# Altium PCB Motor_Controller_Interface_Board.PcbDoc
Units mm, origin at the board's own origin, x right, y up, seen from the top; angles counter-clockwise.
Board outline 50 x 50 mm, 2 copper layers (Top Layer, Bottom Layer); 35 components, 45 nets, 173 pads, 37 vias.
Unrouted connection lines stored in the file: 12.
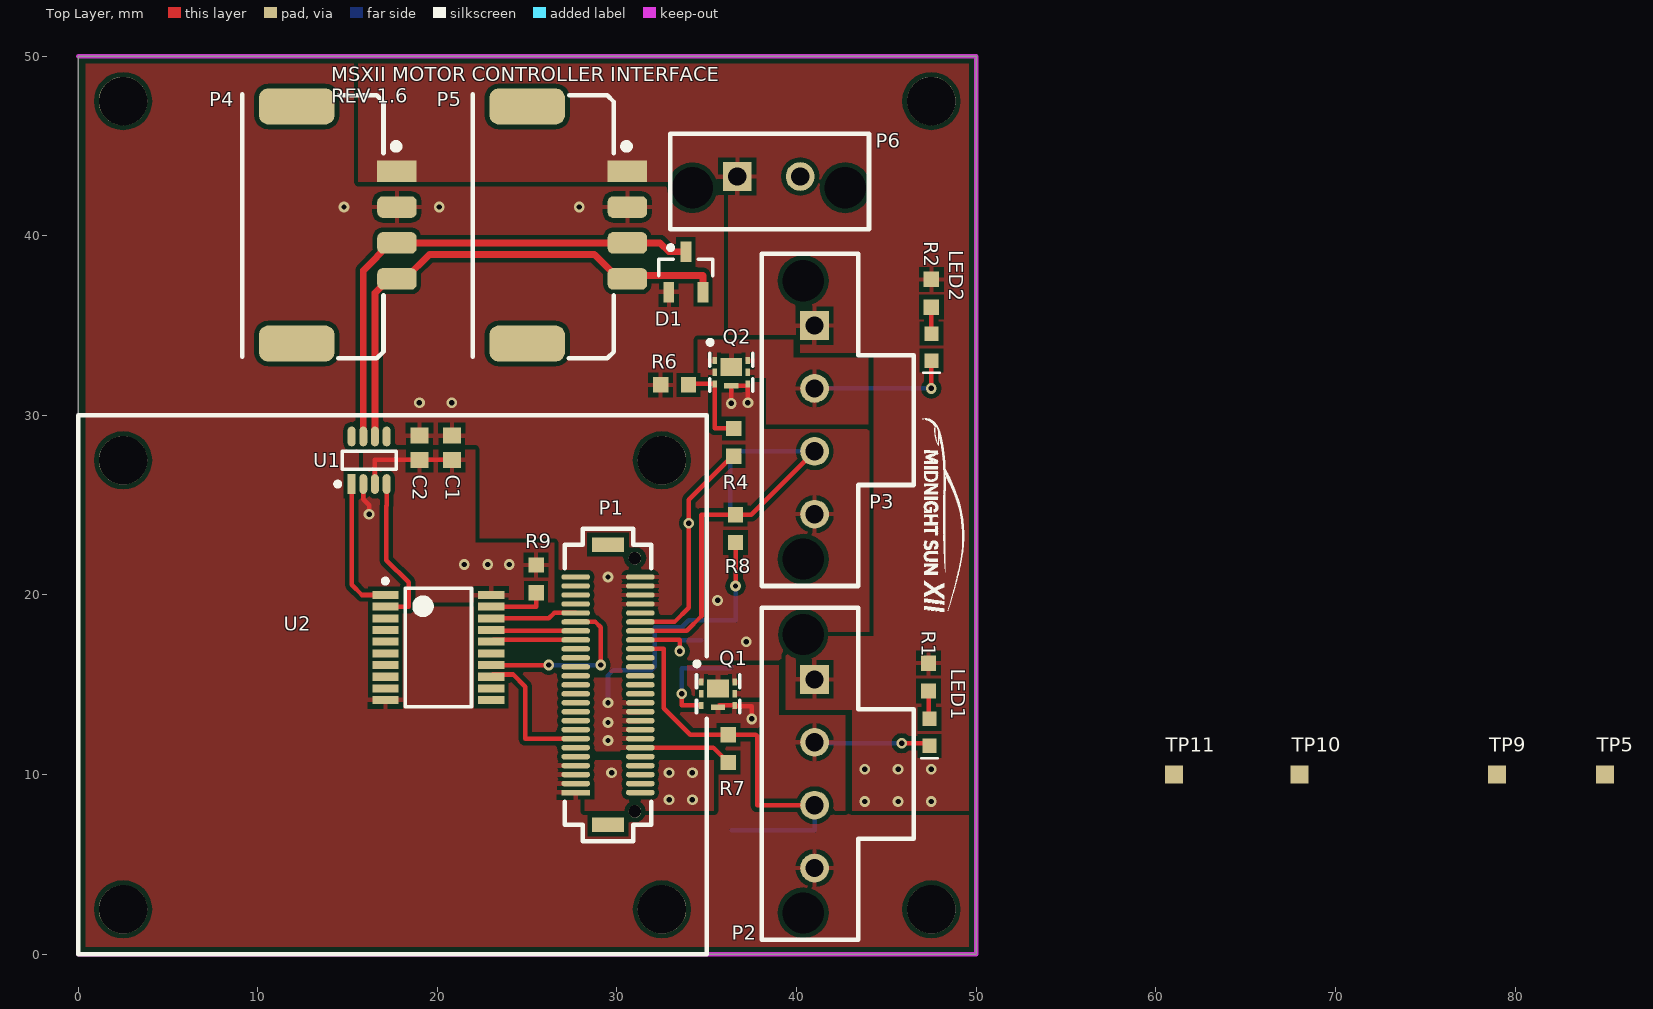
[diagram p0: Top Layer view]
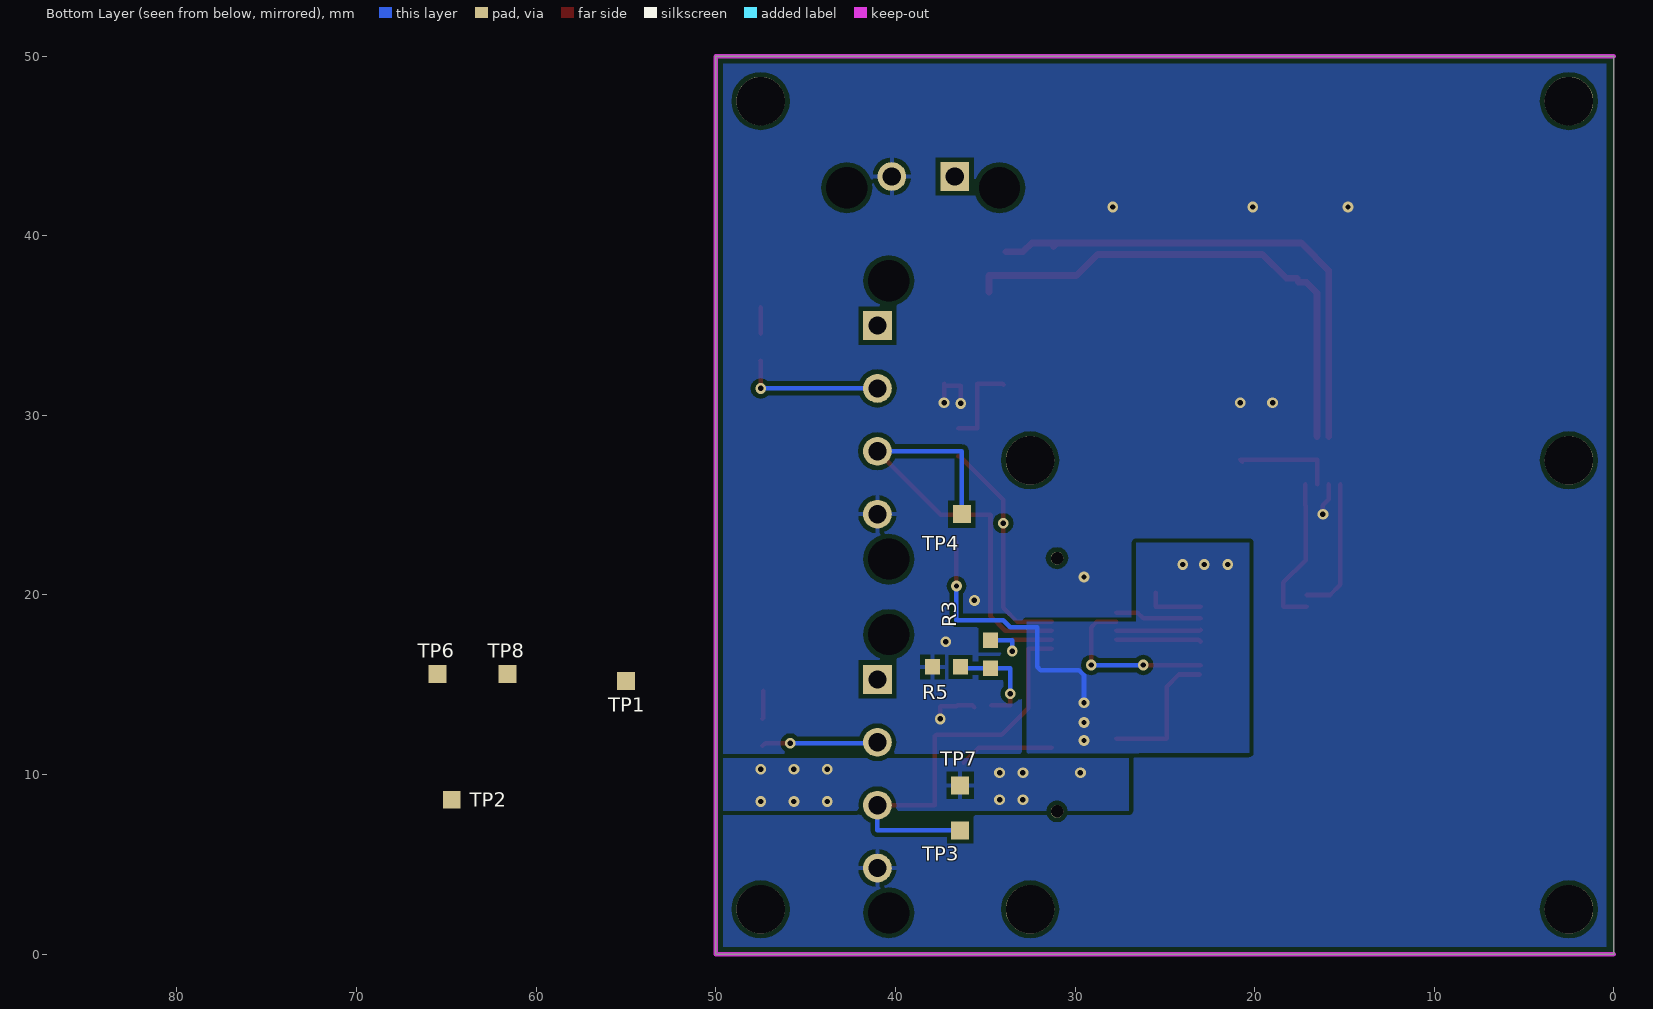
[diagram p1: Bottom Layer view, seen from below]

## Layer stack, top to bottom
Top Solder: solder mask 0.0102, Solder Resist, Dk 3.5
Top Layer: signal copper 0.0356
Dielectric 1: dielectric 0.32, FR-4, Dk 4.8
Bottom Layer: signal copper 0.0356
Bottom Solder: solder mask 0.0102, Solder Resist, Dk 3.5

## Board outline
0,0 0,50 50,50 50,0

## Design rules (kind name [scope] priority, off if disabled: settings)
BoardOutlineClearance [All] p1: gap=0.406 ignorepadtopadclearanceinfootprint=FALSE
Clearance [All] p1: gap=0.254 ignorepadtopadclearanceinfootprint=TRUE except(0: Arc-Hole Track-Hole SMDPad-Hole THPad-Hole Via-Hole Fill-Hole Poly-Hole Region-Hole Text-Hole; 0.152: Arc-Arc Arc-Track Arc-SMDPad Track-Track Track-SMDPad SMDPad-SMDPad)
ComponentClearance ComponentClearance_ControllerBoard [InComponent('P1') vs Identifier = 'Controller_Board'] p1: gap=0 collisioncheckmode=3 verticalgap=0 showdistances=FALSE
ComponentClearance ComponentClearance_Standoffs [Identifier = 'Standoff' vs Identifier = 'Controller_Board'] p2: gap=0 collisioncheckmode=3 verticalgap=0 showdistances=FALSE
ComponentClearance [All] p3: gap=0.254 collisioncheckmode=3 verticalgap=0.254 showdistances=FALSE
DiffPairsRouting [All] p1: maxlimit=0.254 minlimit=0.254 mostfreqgap=0.254 toplayer_minwidth=0.381 toplayer_maxwidth=0.381 toplayer_prefwidth=0.381 bottomlayer_minwidth=0.381 bottomlayer_maxwidth=0.381 bottomlayer_prefwidth=0.381 maxuncoupledlength=12.7
HoleSize [All] p1: absolutevalues=TRUE maxlimit=6.3 minlimit=0.3 maxpercent=80.000 minpercent=20.000
MinimumAnnularRing [All] p1: minimumring=0.15
MinimumSolderMaskSliver [All] p1: minsoldermaskwidth=0.3
PolygonConnect PolygonConnect_Via [IsVia] p1: connectstyle=Direct reliefconductorwidth=0.254 reliefentries=4 polygonreliefangle="90 Angle" airgapwidth=0.254
PolygonConnect PolygonConnect_Direct [InComponent('P5') OR InComponent('P4') vs InNet('12V')] p2: connectstyle=Direct reliefconductorwidth=0.254 reliefentries=4 polygonreliefangle="90 Angle" airgapwidth=0.254
PolygonConnect [All] p3: connectstyle=Relief reliefconductorwidth=0.254 reliefentries=4 polygonreliefangle="90 Angle" airgapwidth=0.254
PolygonConnect PolygonConnect_NoThermal [Not(IsPad)] p4: connectstyle=Direct reliefconductorwidth=0.254 reliefentries=4 polygonreliefangle="90 Angle" airgapwidth=0.254
RoutingVias [All] p1: holewidth=0.3 width=0.6 viastyle="Through Hole" minholewidth=0.3 minwidth=0.6 maxholewidth=0.711 maxwidth=1.27
SilkToSilkClearance SilkToSilkClearance_Top [OnLayer('Top Overlay') vs OnLayer('Top Overlay')] p1: silktosilkclearance=0.254
SilkToSilkClearance SilkToSilkClearance_Bottom [OnLayer('Bottom Overlay') vs OnLayer('Bottom Overlay')] p2: silktosilkclearance=0.254
SilkToSolderMaskClearance [IsPad] p1: minsilkscreentomaskgap=0.178 clearancetoexposedcopper=TRUE
SolderMaskExpansion [All] p1: expansion=0.102
Width Width_12V [InNet('12V')] p1: maxlimit=0.381 minlimit=0.381 preferedwidth=0.381
Width [All] p2: maxlimit=2.54 minlimit=0.152 preferedwidth=0.254
24 further rules are at their usual default settings.

## Classes and differential pairs
component class Pre_Charge_Interface: LED1 LED2 P2 P3 Q1 Q2 R1 R2 R3 R4 R5 R6 R7 R8 TP1 TP2 TP3 TP4
component class Slave_Controller: C1 C2 D1 P4 P5 P6 R9 TP5 TP6 TP7 TP8 TP9 TP10 TP11 U1 U2
component class Controller_Board_Interface: P1
differential pair CAN: +MOTOR_CONTROLLER_CAN_P -MOTOR_CONTROLLER_CAN_N

## Components (designator, comment, footprint, x,y, rotation, side; value= is the part's Value field where it differs from the comment)
C1 "CAP CER 4.7UF 25V 10% X5R 0603" "CAP, 0603" 20.809,28.2 r270 top
C2 "CAP CER 0.1UF 50V 10% X7R 0603" "CAP, 0603" 19.004,28.2 r270 top
D1 "DIODE TVS 24VWM 70VC SOT23" SOT23 33.836,37.989 r90 top
LED1 "LED GREEN CLEAR 2V 0603" LED_0603 47.39,13.05 r270 top
LED2 "LED GREEN CLEAR 2V 0603" LED_0603 47.5,34.5 r270 top
P1 "CONN 50POS Bergstak Plug 0.02\"" "CONN, BERGSTAK 50 POS PLUG" 29.5,15 r180 top locked
P2 "CONN 4POS ULTRA-FIT 0.138\"" "CONN, 4POS ULTRA-FIT" 41,15.3 r270 top
P3 "CONN 4POS ULTRA-FIT 0.138\"" "CONN, 4POS ULTRA-FIT" 41,35 r270 top
P4 "Dura-Clik" "CONN, 4POS DURA-CLIK VERT" 17.75,43.6 r270 top
P5 "Dura-Clik" "CONN, 4POS DURA-CLIK VERT" 30.58,43.6 r270 top
P6 "CONN 2POS ULTRA-FIT 0.138\"" "CONN, 2POS ULTRA-FIT" 36.7,43.3 r0 top
Q1 "MOSFET N-CH 30V 8.7A 2.1W 6-PQFN (2x2)" "MOSFET N-CH 30V 12A 2mmx2mm PQFN" 34.7,15.15 r270 top
Q2 "MOSFET N-CH 30V 8.7A 2.1W 6-PQFN (2x2)" "MOSFET N-CH 30V 12A 2mmx2mm PQFN" 35.439,33.05 r270 top
R1 "RES 4.7K OHM 1% 1/10W 0603" "RES, 0603" 47.349,15.431 r270 top
R2 "RES 4.7K OHM 1% 1/10W 0603" "RES, 0603" 47.5,36.8 r270 top
R3 "RES 22.1 OHM 1% 1/10W 0603" "RES, 0603" 34.7,16.7 r90 bottom
R4 "RES 22.1 OHM 1% 1/10W 0603" "RES, 0603" 36.5,28.5 r90 top
R5 "RES 10K OHM 1% 1/10W 0603" "RES, 0603" 37.154,16 r0 bottom
R6 "RES 10K OHM 1% 1/10W 0603" "RES, 0603" 33.205,31.7 r180 top
R7 "RES 10K OHM 1% 1/10W 0603" "RES, 0603" 36.2,11.446 r90 top
R8 "RES 10K OHM 1% 1/10W 0603" "RES, 0603" 36.6,23.7 r90 top
R9 "RES 10K OHM 1% 1/10W 0603" "RES, 0603" 25.5,20.9 r270 top
TP1 "Test Point" "Test Point" 55,15.2 r0 bottom
TP2 "Test Point" "Test Point" 64.7,8.6 r90 bottom
TP3 "Test Point" "Test Point" 36.4,6.9 r90 bottom
TP4 "Test Point" "Test Point" 36.3,24.5 r90 bottom
TP5 "CAN_TX" "Test Point" 85,10 r90 top
TP6 "Test Point" "Test Point" 65.5,15.6 r90 bottom
TP7 "Test Point" "Test Point" 36.4,9.4 r90 bottom
TP8 "Test Point" "Test Point" 61.6,15.6 r90 bottom
TP9 "CAN_RX" "Test Point" 79,10 r90 top
TP10 "CAN_CLOCK" "Test Point" 68,10 r90 top
TP11 "CAN_INT_n" "Test Point" 61,10 r90 top
U1 "IC CAN Tranceiver TCAN332DR" TSOP65P280X145-8N 16.2,27.5 r90 top
U2 "MCP2515" TSSOP65P640X120-20N 20.05,17.075 r0 top

## Footprints (in the part's own frame and the unit in brackets; to place one, negate y for a bottom-side part, rotate by r counter-clockwise, add the part's x,y. Pads: shape width x height; smd on the part's side, far side on the other; paste and mask are expansions set on the pad)
"CAP, 0603" [mm] "Chip Capacitor, 2-Leads, Body 1.60x0.81mm, IPC Medium Density"
  rect 0.9x1 smd mask+0.076: 1(-0.675,0) 2(0.675,0)
  body extent -0.87,-0.48 0.87,0.48, height 0.9
"CONN, 2POS ULTRA-FIT" [mm] "2 Positions Header, Shrouded Connector 0.138\" (3.50mm) Through Hole Gold"
  rect 1.6x1.6 hole 1.02: 1(0,0)
  round 1.6 hole 1.02: 2(3.5,0)
  round 1.6 hole 2.3: ""(-2.5,-0.63) ""(6,-0.63)
  silkscreen extent -3.74,-2.93 7.33,2.37, body extent -3.48,-2.87 7.12,5.79, height 13.85
"CONN, 4POS DURA-CLIK VERT" [mm]
  rect 1.2x2.2 smd: 1(0,0)
  rrect50% 1.2x2.2 smd: 2(2,0) 3(4,0) 4(6,0)
  rrect50% 2x4.2 smd: 7(-3.6,-5.58) 7(9.6,-5.58)
  silkscreen extent -4.28,-8.61 10.42,0.05, body extent -4.28,-8.61 10.32,0.54, height 8
"CONN, 4POS ULTRA-FIT" [mm]
  rect 1.6x1.6 hole 1.02: 1(0,0)
  round 1.6 hole 1.02: 2(3.5,0) 3(7,0) 4(10.5,0)
  round 0 hole 2.3: ""(-2.5,-0.63) ""(13,-0.63)
  silkscreen extent -4,-2.93 14.5,5.53, body extent -3.54,-2.78 14.06,5.88, height 13.85
"CONN, BERGSTAK 50 POS PLUG" [mm] "Bergstak 50 Position Plug"
  rect 1.6x0.3 smd: 1(1.8,6)
  oval 1.6x0.3 smd: 2(1.8,5.5) 3(1.8,5) 4(1.8,4.5) 5(1.8,4) 6(1.8,3.5) 7(1.8,3) 8(1.8,2.5) 9(1.8,2) 10(1.8,1.5) 11(1.8,1) 12(1.8,0.5) 13(1.8,0) 14(1.8,-0.5) 15(1.8,-1) 16(1.8,-1.5) 17(1.8,-2) 18(1.8,-2.5) 19(1.8,-3) 20(1.8,-3.5) 21(1.8,-4) 22(1.8,-4.5) 23(1.8,-5) 24(1.8,-5.5) 25(1.8,-6) 26(-1.8,-6) 27(-1.8,-5.5) 28(-1.8,-5) 29(-1.8,-4.5) 30(-1.8,-4) 31(-1.8,-3.5) 32(-1.8,-3) 33(-1.8,-2.5) 34(-1.8,-2) 35(-1.8,-1.5) 36(-1.8,-1) 37(-1.8,-0.5) 38(-1.8,0) 39(-1.8,0.5) 40(-1.8,1) 41(-1.8,1.5) 42(-1.8,2) 43(-1.8,2.5) 44(-1.8,3) 45(-1.8,3.5) 46(-1.8,4) 47(-1.8,4.5) 48(-1.8,5) 49(-1.8,5.5) 50(-1.8,6)
  round 0.7 hole 0.7: ""(-1.5,7.05) ""(-1.5,-7.05)
  rect 1.8x0.8 smd: ""(0,7.8) ""(0,-7.8)
  silkscreen extent -2.4,-8.7 2.4,8.7, body extent -2.3,-7.75 2.3,7.75, height 4.2
LED_0603 [mm]
  rect 0.8x0.8 smd: 1(-0.05,0.01) 2(1.45,0.01)
  silkscreen extent 2.13,-0.46 2.13,0.45, body extent -0.09,-0.39 1.51,0.41, height 0.8
"MOSFET N-CH 30V 12A 2mmx2mm PQFN" [mm] "PQFN, 6-Leads, Body 2.00x2.00mm, Pitch 0.65mm/0.50mm, Thermal Pad 1.00x1.20mm, IPC Medium Density"
  rect 0.4x0.25 smd: 1(0,0) 2(0.65,0) 3(1.3,0) 4(1.3,1.85) 5(0.65,1.85) 6(0,1.85)
  rect 1x1.2 smd: 7(0.35,0.925)
  rect 0.3x0.79 smd: 8(1.39,0.925)
  silkscreen extent -1.14,-0.38 1.7,2.12, body extent -0.4,-0.13 1.7,1.97, height 1
"RES, 0603" [mm] "Chip Resistor, 2-Leads, Body 1.60x0.80mm, IPC Medium Density"
  rect 0.85x0.85 smd: 1(-0.775,0) 2(0.775,0)
  body extent -0.8,-0.4 0.8,0.4, height 0.55
SOT23 [mm] "SOT23, 3-Leads, Body 2.9x1.3mm, Pitch 0.95mm, Lead Span 2.3mm - Reverse Pinning, IPC Medium Density"
  rect 1.15x0.6 smd: 1(1.125,0) 2(-1.125,-0.95) 3(-1.125,0.95)
  silkscreen extent -0.2,-1.5 1.47,1.5, body extent -0.7,-1.5 0.7,1.5, height 1.1
"Test Point" [mm]
  rect 1x1 smd paste-2: TP(0,0)
TSOP65P280X145-8N [mm] "TSOP, 8-Leads, Body 2.90x1.60mm, Pitch 0.65mm, IPC Medium Density"
  rect 1.1x0.45 smd: 1(-1.325,0.975)
  oval 1.1x0.45 smd: 2(-1.325,0.325) 3(-1.325,-0.325) 4(-1.325,-0.975) 5(1.325,-0.975) 6(1.325,-0.325) 7(1.325,0.325) 8(1.325,0.975)
  silkscreen extent -1.45,-1.5 0.5,1.87, body extent -1.39,-1.5 1.39,1.5, height 1.45
TSSOP65P640X120-20N [mm] "TSSOP, 20-Leads, Body 6.50x4.40mm, Pitch 0.65mm, IPC Medium Density"
  rect 1.45x0.45 smd: 1(-2.95,2.925) 2(-2.95,2.275) 3(-2.95,1.625) 4(-2.95,0.975) 5(-2.95,0.325) 6(-2.95,-0.325) 7(-2.95,-0.975) 8(-2.95,-1.625) 9(-2.95,-2.275) 10(-2.95,-2.925) 11(2.95,-2.925) 12(2.95,-2.275) 13(2.95,-1.625) 14(2.95,-0.975) 15(2.95,-0.325) 16(2.95,0.325) 17(2.95,0.975) 18(2.95,1.625) 19(2.95,2.275) 20(2.95,2.925)
  silkscreen extent -3.07,-3.3 1.85,3.82, body extent -2.25,-3.3 2.25,3.3, height 1.2

## Part data
C1: "4.7µF ±10% 25V Ceramic Capacitor X5R 0603 (1608 Metric)", Capacitance=4.7µF, Manufacturer 1="Murata Electronics North America", Manufacturer Part Number 1=GRM188R61E475KE11D, Operating Temperature="-55°C ~ 85°C", Package / Case="0603 (1608 Metric)", Ratings=-, Supplier Part Number 1=490-7203-1-ND, Temperature Coefficient=X5R, Tolerance=±10%, Voltage=25V, ComponentLink1Description=http://www.murata.com/~/media/webrenewal/support/library/catalog/products/capacitor/mlcc/c02e.ashx, ComponentLink1URL=http://www.murata.com/~/media/webrenewal/support/library/catalog/products/capacitor/mlcc/c02e.ashx, Height - Seated (Max)=-, Lead Spacing=-, Lead Style=-, Mounting Type="Surface Mount, MLCC", Packaging="Cut Tape (CT)", Part Status=Active, Size / Dimension="0.063\" L x 0.031\" W (1.60mm x 0.80mm)", Supplier 1=Digi-Key, Thickness (Max)="0.031\" (0.80mm)"
C2: "0.10µF ±10% 50V Ceramic Capacitor X7R 0603 (1608 Metric)", Capacitance=0.1µF, Manufacturer 1="AVX Corporation", Manufacturer Part Number 1=06035C104KAT2A, Operating Temperature="-55°C ~ 125°C", Package / Case="0603 (1608 Metric)", Ratings=-, Supplier Part Number 1=478-5052-1-ND, Temperature Coefficient=X7R, Tolerance=±10%, Voltage=50V, ComponentLink1Description=http://datasheets.avx.com/X7RDielectric.pdf, ComponentLink1URL=http://datasheets.avx.com/X7RDielectric.pdf, Height - Seated (Max)=-, Lead Spacing=-, Lead Style=-, Mounting Type="Surface Mount, MLCC", Packaging="Cut Tape (CT)", Part Status=Active, Size / Dimension="0.063\" L x 0.032\" W (1.60mm x 0.81mm)", Supplier 1=Digi-Key, Thickness (Max)="0.035\" (0.90mm)"
D1: "TVS DIODE 24VWM 70VC SOT23", Capacitance @ Frequency="11pF @ 1MHz", Current - Peak Pulse (10/1000µs)="3A (8/20µs)", Manufacturer 1="Nexperia USA Inc.", Manufacturer Part Number 1=PESD1CAN,215, Operating Temperature="-65°C ~ 150°C (TA)", Package / Case="TO-236-3, SC-59, SOT-23-3", Power - Peak Pulse=200W, Power Line Protection=No, Supplier Device Package="SOT-23 (TO-236AB)", Supplier Part Number 1=1727-3817-1-ND, Voltage - Breakdown (Min)=25.4V, Voltage - Clamping (Max) @ Ipp=70V, ComponentLink1Description=http://assets.nexperia.com/documents/data-sheet/PESD1CAN.pdf, ComponentLink1URL=http://assets.nexperia.com/documents/data-sheet/PESD1CAN.pdf, Mounting Type="Surface Mount", Packaging="Cut Tape (CT)", Part Status=Active, Supplier 1=Digi-Key, Type=Zener
LED1 LED2: "Green 572nm LED Indication - Discrete 2V 0603 (1608 Metric)", Color=Green, Current - Test=20mA, Lens Color=Colorless, Manufacturer="Wurth Electronics Inc.", Manufacturer Part Number=150060VS75000, Millicandela Rating=40mcd, Package / Case="0603 (1608 Metric)", Supplier Device Package=0603, Supplier Part Number 1=732-4980-1-ND, Voltage - Forward (Vf) (Typ)=2V, Category=Optoelectronics, ComponentLink1Description=http://katalog.we-online.de/led/datasheet/150060VS75000.pdf, ComponentLink1URL=http://katalog.we-online.de/led/datasheet/150060VS75000.pdf, Features=-, Height (Max)=0.80mm, Lens Style/Size="Rectangle with Flat Top, 1.10mm x 0.70mm", Lens Transparency=Clear, Mounting Type="Surface Mount", Packaging="Cut Tape (CT)", Part Status=Active, Pricing 1="1=0.21, 100=0.1617, 500=0.13964 (CAD)", RoHS="RoHS Compliant", Size / Dimension="1.60mm L x 0.80mm W", Stock 1=9408, Supplier 1=Digi-Key, Viewing Angle=140°, Wavelength - Dominant=570nm, Wavelength - Peak=572nm
P1: "50 Position Connector Plug, Outer Shroud Contacts Surface Mount Gold", Manufacturer 1="Amphenol FCI", Manufacturer Part Number 1=10132797-055100LF, Supplier Part Number 1=609-5226-1-ND, ComponentLink1Description=http://portal.fciconnect.com/Comergent//fci/drawing/10132797.pdf, ComponentLink1URL=http://portal.fciconnect.com/Comergent//fci/drawing/10132797.pdf, Connector Type="Plug, Outer Shroud Contacts", Contact Finish=Gold, Contact Finish Thickness="1µin (0.025µm)", Height Above Board="0.169\" (4.30mm)", Mated Stacking Heights=5mm, Mounting Type="Surface Mount", Number of Positions=50, Number of Rows=2, Packaging="Cut Tape (CT)", Part Status=Active, Pitch="0.020\" (0.50mm)", Series="BergStak Plug", Supplier 1=Digi-Key
P2 P3: "4 Positions Header Connector 0.138\" (3.50mm) Through Hole Tin", Current Rating=-, Insulation Color=Black, Manufacturer 1="Molex, LLC", Manufacturer Part Number 1=1722871104, Material Flammability Rating="UL94 V-0", Operating Temperature="-40°C ~ 105°C", Supplier Part Number 1=WM11703-ND, Voltage=400V, ComponentLink1Description=http://www.molex.com/pdm_docs/sd/1722871104_sd.pdf, ComponentLink1URL=http://www.molex.com/pdm_docs/sd/1722871104_sd.pdf, Connector Type=Header, Contact Finish - Mating=Tin, Contact Finish - Post=Tin, Contact Finish Thickness - Mating="60µin (1.52µm)", Contact Finish Thickness - Post="60µin (1.52µm)", Contact Length - Mating=-, Contact Length - Post="0.126\" (3.20mm)", Contact Material="Copper Alloy", Contact Shape=Square, Contact Type="Male Pin", Fastening Type="Latch Holder", Ingress Protection=-, Insulation Height="0.465\" (11.80mm)", Insulation Material="Liquid Crystal Polymer (LCP)", Mated Stacking Heights=26.99mm, Mounting Type="Through Hole", Number of Positions=4, Number of Positions Loaded=All, Number of Rows=1, Overall Contact Length=-, Packaging=Tray, Part Status=Active, Pitch - Mating="0.138\" (3.50mm)", Row Spacing - Mating=-, Series=UltraFit, Shrouding="Shrouded - 4 Wall", Style="Board to Cable/Wire", Supplier 1=Digi-Key, Termination=Solder
P4 P5: library part "CONN 4POS DURA-CLIK 0.079\"", "4 Positions Header Connector 0.079\" (2.00mm) Surface Mount Tin", Current Rating=-, Insulation Color=Natural, Manufacturer="Molex, LLC", Manufacturer Part Number=5600200420, Supplier Part Number 1=WM10864CT-ND, Applications="Automotive, Industrial", Category="Connectors, Interconnects", ComponentLink1Description=http://www.molex.com/pdm_docs/sd/5600200420_sd.pdf, ComponentLink1URL=http://www.molex.com/pdm_docs/sd/5600200420_sd.pdf, Connector Type=Header, Contact Finish - Mating=Tin, Contact Finish - Post=Tin, Contact Finish Thickness - Mating=-, Contact Finish Thickness - Post=-, Contact Length - Mating=-, Contact Length - Post=-, Contact Material="Copper Alloy", Contact Shape=Square, Contact Type="Male Pin", Fastening Type="Latch Lock", Features="Solder Retention", Ingress Protection=-, Insulation Height="0.315\" (8.00mm)", Insulation Material="Polyamide (PA), Nylon", Mated Stacking Heights=9.3mm, Material Flammability Rating=-, Mounting Type="Surface Mount", Number of Positions=4, Number of Positions Loaded=All, Number of Rows=1, Operating Temperature=-, Overall Contact Length=-, Packaging="Cut Tape (CT)", Part Status=Active, Pitch - Mating="0.079\" (2.00mm)", Pricing 1="1=2.23, 10=2.022, 25=1.898, 50=1.8156, 100=1.733 (CAD)", RoHS="RoHS Compliant", Row Spacing - Mating=-, Shrouding="Shrouded - 4 Wall", Stock 1=9367, Style="Board to Cable/Wire", Supplier 1=Digi-Key, Termination=Solder, Voltage Rating=-
P6: "2 Positions Header, Shrouded Connector 0.138\" (3.50mm) Through Hole Gold", Current Rating=-, Insulation Color=Black, Manufacturer 1="Molex, LLC", Manufacturer Part Number 1=1722861302, Material Flammability Rating="UL94 V-0", Operating Temperature="-40°C ~ 120°C", Supplier Part Number 1=WM11673-ND, Voltage=400V, ComponentLink1Description=http://www.molex.com/pdm_docs/sd/1722861302_sd.pdf, ComponentLink1URL=http://www.molex.com/pdm_docs/sd/1722861302_sd.pdf, Connector Type=Header, Contact Finish - Mating=Gold, Contact Finish - Post=Tin, Contact Finish Thickness - Mating="30µin (0.76µm)", Contact Finish Thickness - Post="60µin (1.52µm)", Contact Length - Mating=-, Contact Length - Post="0.126\" (3.20mm)", Contact Material="Copper Alloy", Contact Shape=Square, Contact Type="Male Pin", Fastening Type="Latch Holder", Ingress Protection=-, Insulation Height="0.465\" (11.80mm)", Insulation Material="Liquid Crystal Polymer (LCP)", Mated Stacking Heights=26.99mm, Mounting Type="Through Hole", Number of Positions=2, Number of Positions Loaded=All, Number of Rows=1, Overall Contact Length=-, Packaging=Tray, Part Status=Active, Pitch - Mating="0.138\" (3.50mm)", Row Spacing - Mating=-, Series=UltraFit, Shrouding="Shrouded - 4 Wall", Style="Board to Board or Cable", Supplier 1=Digi-Key, Termination="Kinked Pin, Solder"
Q1 Q2: Current - Continuous Drain (Id) @ 25°C=8.7A, Drain to Source Voltage (Vdss)=30V, Drive Voltage (Max Rds On,  Min Rds On)="2.5V, 4.5V", Input Capacitance (Ciss) (Max) @ Vds="1019pF @ 25V", Manufacturer 1="Infineon Technologies", Manufacturer Part Number 1=IRLHS6342TRPBF, Operating Temperature="-55°C ~ 150°C (TJ)", Package / Case=6-PowerVDFN, Power Dissipation (Max)=2.1W, Supplier Device Package="6-PQFN (2x2)", Supplier Part Number 1=IRLHS6342TRPBFCT-ND, Category="Discrete Semiconductor Products", ComponentLink1Description=http://www.infineon.com/dgdl/irlhs6342pbf.pdf?fileId=5546d462533600a401535663b52625ad, ComponentLink1URL=http://www.infineon.com/dgdl/irlhs6342pbf.pdf?fileId=5546d462533600a401535663b52625ad, Description 1="MOSFET N-CH 30V 8.7A 2X2 PQFN", FET Feature=-, FET Type=N-Channel, Gate Charge (Qg) (Max) @ Vgs="11nC @ 4.5V", Mounting Type="Surface Mount", Packaging="Cut Tape (CT)", Part Status=Active, Pricing 1="1=0.79, 10=0.685, 100=0.5118, 500=0.4022, 1000=0.31079 (CAD)", Rds On (Max) @ Id, Vgs="15.5 mOhm @ 8.5A, 4.5V", RoHS="RoHS Compliant", Stock 1=9984, Supplier 1=Digi-Key, Technology="MOSFET (Metal Oxide)", Vgs (Max)=±12V, Vgs(th) (Max) @ Id="1.1V @ 10µA"
R1 R2: "4.7k Ohm ±1% 0.1W, 1/10W Chip Resistor 0603 (1608 Metric) Moisture Resistant Thick Film", Manufacturer 1=Yageo, Manufacturer Part Number 1=RC0603FR-074K7L, Operating Temperature="-55°C ~ 155°C", Package / Case="0603 (1608 Metric)", Power (Watts)=1/10W, Resistance (Ohms)=4.7k, Supplier Device Package=0603, Supplier Part Number 1=311-4.70KHRCT-ND, Temperature Coefficient=±100ppm/°C, Tolerance=±1%, Category=Resistors, ComponentLink1Description=http://www.yageo.com/documents/recent/PYu-RC_Group_51_RoHS_L_7.pdf, ComponentLink1URL=http://www.yageo.com/documents/recent/PYu-RC_Group_51_RoHS_L_7.pdf, Composition="Thick Film", Description 1="RES SMD 4.7K OHM 1% 1/10W 0603", Failure Rate=-, Features="Moisture Resistant", Height - Seated (Max)="0.022\" (0.55mm)", Packaging="Cut Tape (CT)", Part Status=Active, Pricing 1="1=0.16, 10=0.022, 100=0.0089, 1000=0.00402, 2500=0.00349 (CAD)", RoHS="RoHS Compliant", Size / Dimension="0.063\" L x 0.031\" W (1.60mm x 0.80mm)", Stock 1=3487566, Supplier 1=Digi-Key
R3 R4: "22.1 Ohm ±1% 0.1W, 1/10W Chip Resistor 0603 (1608 Metric) Moisture Resistant Thick Film", Manufacturer 1=Yageo, Manufacturer Part Number 1=RC0603FR-0722R1L, Operating Temperature="-55°C ~ 155°C", Package / Case="0603 (1608 Metric)", Power=1/10W, Resistance=22.1, Supplier Device Package=0603, Supplier Part Number 1=311-22.1HRCT-ND, Temperature Coefficient=±100ppm/°C, Tolerance=±1%, ComponentLink1Description=http://www.yageo.com/documents/recent/PYu-RC_Group_51_RoHS_L_7.pdf, ComponentLink1URL=http://www.yageo.com/documents/recent/PYu-RC_Group_51_RoHS_L_7.pdf, Composition="Thick Film", Failure Rate=-, Height - Seated (Max)="0.022\" (0.55mm)", Packaging="Cut Tape (CT)", Part Status=Active, Size / Dimension="0.063\" L x 0.031\" W (1.60mm x 0.80mm)", Supplier 1=Digi-Key
R5 R6 R7 R8 R9: "RES SMD 10K OHM 1% 1/10W 0603", Manufacturer 1=Yageo, Manufacturer Part Number 1=RC0603FR-0710KL, Operating Temperature="-55°C ~ 155°C", Package / Case="0603 (1608 Metric)", Power=1/10W, Resistance=10k, Supplier Device Package=0603, Supplier Part Number 1=311-10.0KHRCT-ND, Temperature Coefficient=±100ppm/°C, Tolerance=±1%, ComponentLink1Description=http://www.yageo.com/documents/recent/PYu-RC_Group_51_RoHS_L_7.pdf, ComponentLink1URL=http://www.yageo.com/documents/recent/PYu-RC_Group_51_RoHS_L_7.pdf, Composition="Thick Film", Failure Rate=-, Height - Seated (Max)="0.022\" (0.55mm)", Packaging="Cut Tape (CT)", Part Status=Active, Size / Dimension="0.063\" L x 0.031\" W (1.60mm x 0.80mm)", Supplier 1=Digi-Key
TP5 TP9 TP10 TP11: library part "Test Point"
U1: "1/1 Transceiver CAN 8-SOIC", Digikey Part Number=296-43711-1-ND, Manufacturer Part Number=TCAN332DR, Supplier 1=Digi-Key, Supplier Part Number 1=296-43711-1-ND
U2: library part "IC CAN SPI CONTROLLER MCP2515T-I/ST 20-TSSOP", "CAN Controller CAN 2.0 SPI Interface 20-TSSOP", Current - Supply=10mA, Manufacturer="Microchip Technology", Manufacturer Part Number=MCP2515T-I/ST, Operating Temperature="-40°C ~ 85°C", Package / Case="20-TSSOP (0.173\", 4.40mm Width)", Supplier Device Package=20-TSSOP, Supplier Part Number 1=MCP2515T-I/STCT-ND, Voltage - Supply="2.7 V ~ 5.5 V", Base Part Number=MCP2515, Category="Integrated Circuits (ICs)", ComponentLink1Description=http://www.microchip.com/mymicrochip/filehandler.aspx?ddocname=en011733, ComponentLink1URL=http://www.microchip.com/mymicrochip/filehandler.aspx?ddocname=en011733, Function=Controller, Interface=SPI, Packaging="Cut Tape (CT)", Part Status=Active, Pricing 1="1=3.04, 25=2.5372, 100=2.3076 (CAD)", Protocol=CAN, RoHS="RoHS Compliant", Standards="CAN 2.0", Stock 1=27278, Supplier 1=Digi-Key

## Free pads (board coordinates)
  round 2.7 hole 2.7: ""(2.5,2.5) ""(2.5,27.5) ""(2.5,47.5) ""(32.5,2.5) ""(32.5,27.5) ""(47.5,2.5) ""(47.5,47.5)

## Via types
v1: diameter 0.6, hole 0.3, Top Layer to Bottom Layer, 37 vias

## Nets (pads, with @x,y where several pads share a name; then routed paths per layer and width w, separated by ;. In a path a pad name is that pad's centre, name@x,y a point inside that pad or via, vN(x,y) a via of type N, cw(c..) or ccw(c..) an arc to the next point about the centre after c; other vN are vias at no path point)
3V3: C1.2 C2.2 P1.40 P1.41 P1.42 P1.43 P1.44 P1.45 R7.1 R8.1 R9.1 TP6.TP U1.3 U2.20 | length 26.5
  Top Layer w0.254: U1.3 16.525,27.525 C2.2 C1.2 C1.2@20.7,27.416 ; P1.45 35.371,11.5 R7.1 ; v1(36.6,20.5) R8.1
  Bottom Layer w0.254: v1(29.5,14) 29.5,15.537 29.781,15.818 31.918,15.818 32.1,16 32.1,18.2 33.6,18.2 34,18.6 36.6,18.6 v1(36.6,20.5)
  other v1: 29.5,11.9 29.5,12.9 21.5,21.7 22.8,21.7 24,21.7
12V: P2.1 P3.1 P4.1 P5.1 P6.1 R1.1 R2.1 TP7.TP
  other v1: 43.8,8.5 45.65,8.5 47.5,8.5 32.9,8.6 34.2,8.6 29.7,10.1 32.9,10.1 34.2,10.1 43.8,10.3 45.65,10.3 47.5,10.3
+12V: P1.47 P1.48 P1.49 P1.50
CAN_INT_n: P1.7 TP11.TP U2.13 | length 7.8
  Top Layer w0.254: U2.13@23.05,15.575 24.225,15.575 24.9,14.9 24.9,12 P1.7
CAN_RX: TP9.TP U1.4 U2.2 | length 8.6
  Top Layer w0.254: U2.2 18.4,19.35 18.4,20.7 17.163,21.937 17.163,24.963 17.175,24.975 U1.4
CAN_TX: TP5.TP U1.1 U2.1 | length 7.7
  Top Layer w0.254: U1.1 15.225,20.575 15.8,20 U2.1
GND: C1.1 C2.1 D1.3 P1.1 P1.2 P1.3 P1.4 P1.26 P1.27 P1.28 P1.29 P2.4 P3.4 P4.2 P5.2 P6.2 Q1.4 Q1.8 Q2.4 Q2.8 R5.2 R6.2 TP8.TP U1.2 U2.10 | length 7.5
  Top Layer w0.254: U1.2 15.875,25.325 16.2,25 v1(16.2,24.5) ; Q1.8@35.6,13.76 35.69,13.85 36.525,13.85 36.575,13.8 37.5,13.8 v1(37.5,13.1) ; v1(36.364,30.666) Q2.8 37.199,31.66 Q2.4 v1(37.289,30.7)
  other v1: 37.2,17.4 35.6,19.7 29.5,21 19,30.7 20.8,30.7 14.8,41.6 20.1,41.6 27.9,41.6
MOTOR_CONTROLLER_CAN_N: D1.2 P4.4 P5.4 U1.6 | length 28.6
  Top Layer w0.381: U1.6 16.525,36.825 17.11,37.41 17.56,37.41 17.642,37.639 18.239,37.639 19.565,38.965 28.735,38.965 29.918,37.782 34.786,37.782 D1.2
MOTOR_CONTROLLER_CAN_P: D1.1 P4.3 P5.3 U1.7 | length 28.7
  Top Layer w0.381: U1.7 15.875,38.075 17.4,39.6 31,39.6 P5.3@31.19,39.41 ; P5.3 32.4,39.6 32.886,39.114 D1.1
NetLED1_1: LED1.1 R1.2 | length 1.6
  Top Layer w0.254: R1.2 47.349,13.151 LED1.1
NetLED2_1: LED2.1 R2.2 | length 1.5
  Top Layer w0.254: LED2.1@47.5,34.56 R2.2
NetQ1_3: Q1.3 R3.1 R5.1 | length 6
  Top Layer w0.254: v1(33.6,14.5) 33.6,13.85 Q1.3@34.675,13.85
  Bottom Layer w0.254: v1(33.6,14.5) 33.6,15.925 R3.1 36.304,15.925 R5.1
NetQ2_3: Q2.3 R4.2 R6.1 | length 5
  Top Layer w0.254: R6.1 34.03,31.75 Q2.3 35.439,29.275 R4.2
NetR9_2: R9.2 U2.19 | length 3.3
  Top Layer w0.254: U2.19 25.5,19.35 R9.2
NetTP10_TP: TP10.TP U2.3
PA0/AN0: P1.25
PA1/AN1: P1.24
PA2/AN2/USART2_TX: P1.23
PA3/AN3/USART2_RX: P1.22
PA4/AN4/SPI1_NSS: P1.21 U2.18 | length 4.8
  Top Layer w0.254: U2.18 26.2,18.7 26.5,19 P1.21
PA5/AN5/SPI1_SCK: P1.20 U2.14 | length 9.8
  Top Layer w0.254: U2.14 v1(26.2,16.1) ; P1.20 28.8,18.5 29.1,18.2 v1(29.1,16.1)
  Bottom Layer w0.254: v1(26.2,16.1) 26.3,16 26.4,16.1 v1(29.1,16.1)
PA6/AN6/SPI1_MISO: P1.19 U2.17 | length 4.7
  Top Layer w0.254: U2.17 23.05,18 P1.19
PA7/AN7/SPI1_MOSI: P1.18 U2.16 | length 4.7
  Top Layer w0.254: U2.16 23.1,17.5 P1.18
PA9: P1.6
PA10: P1.5
PA15/LED_RED: P1.39
PB0/AN8: P1.17
PB1/AN9: P1.16
PB2: P1.15
PB3/LED_GREEN: P1.38
PB4/LED_BLUE: P1.37
PB5/LED_BLUE: P1.36
PB6/RELAY_SENSE_LEFT: P1.34 P2.3 R7.2 TP3.TP | length 23.5
  Top Layer w0.254: P1.34 32.6,17 32.6,13.7 34.079,12.221 R7.2 37.729,12.221 37.8,12.149 37.8,8.3 P2.3
  Bottom Layer w0.254: TP3.TP 41,6.9 P2.3
PB7/PRECHARGE_LEFT: P1.33 R3.2 TP1.TP | length 4.6
  Top Layer w0.254: P1.33 33.5,17.5 v1(33.5,16.875)
  Bottom Layer w0.254: v1(33.5,16.875) 33.5,17.475 R3.2
PB8/RELAY_SENSE_RIGHT: P1.32 P3.3 R8.2 TP4.TP | length 25.3
  Top Layer w0.254: P1.32 33.875,18 34.706,18.832 34.706,24.475 R8.2 37.475,24.475 P3.3
  Bottom Layer w0.254: TP4.TP 36.3,28 P3.3
PB9/PRECHARGE_RIGHT: P1.31 R4.1 TP2.TP | length 12.5
  Top Layer w0.254: P1.31 33.2,18.5 34,19.3 v1(34,24) 34,25.3 36.425,27.725 R4.1
PB10/USART3_TX/I2C2_SCL: P1.14
PB11/USART3_RX/I2C2_SDA: P1.13
PB12/SPI2_NSS: P1.11
PB13/SPI2_SCK: P1.10
PB14/SPI2_MISO: P1.9
PB15/SPI2_MOSI: P1.8
PC13: P1.30
PRECHARGE_GND_LEFT: LED1.2 P2.2 Q1.1 Q1.2 Q1.5 Q1.6 Q1.7 | length 6.5
  Top Layer w0.254: v1(45.85,11.75) 47.25,11.75 LED1.2
  Bottom Layer w0.254: P2.2 41.05,11.75 v1(45.85,11.75)
PRECHARGE_GND_RIGHT: LED2.2 P3.2 Q2.1 Q2.2 Q2.5 Q2.6 Q2.7 | length 8.1
  Top Layer w0.254: v1(47.5,31.5) 47.5,33.04 LED2.2
  Bottom Layer w0.254: P3.2@41.05,31.45 P3.2 v1(47.5,31.5)
pads on no net: P1. P1.12 P1.35 P1.46 P2. P3. P4.7 P5.7 P6. U1.5 U1.8 U2.4 U2.5 U2.6 U2.7 U2.8 U2.9 U2.11 U2.12 U2.15

## Polygon pours and split planes (outlines as drawn)
3V3 on Top Layer "3V3_L01_P059" (solid, pour order 59): 15.875,26.076 15.875,28.075 15.9,28.1 22.1,28.1 22.1,22.9 26.5,22.9 26.5,19.6 17.175,19.6 17.175,26.083
GND on Top Layer "GND_L01_P061" (solid, pour order 61): 0,50 50,50 50,0 0,0
12V on Top Layer "12V_L01_P060" (solid, pour order 60): 35,50 15.6,50 15.6,43 36.2,43 36.2,40.8 36.2,34.5 40.2,34.5 40.2,33.5 44.3,33.5 44.3,17.7 40.7,17.7 39.4,17.7 39.4,13.6 43.1,13.6 43.1,8 50,8 50,13.6 50,50
12V on Top Layer "12V_L01_P056" (solid, pour order 56): 28.2,10.8 28.2,8 35.4,8 35.4,10.8
PRECHARGE_GND_RIGHT on Top Layer "PRECHARGE_GND_RIGHT_L01_P057" (solid, pour order 57): 34.5,32.1 38.3,32.1 38.3,29.5 44,29.5 44,33.2 39.8,33.2 39.8,34.2 34.5,34.2
3V3 on Top Layer "3V3_L01_P055" (solid, pour order 55): 27.7,15.4 31.3,15.4 31.3,14.3 33.1,14.3 33.1,11.3 27.7,11.3
PRECHARGE_GND_LEFT on Top Layer "PRECHARGE_GND_LEFT_L01_P058" (solid, pour order 58): 38.2,14.3 33.9,14.3 33.9,16.1 39,16.1 39,15.2 39,13.3 42.7,13.3 42.7,8 38.2,8
GND on Bottom Layer "GND_L02_P064" (solid, pour order 64): 0,0 50,0 50,50 0,50
3V3 on Bottom Layer "3V3_L02_P063" (solid, pour order 63): 20.3,18.4 20.3,22.9 26.6,22.9 26.6,18.5 32.7,18.5 32.7,11.161 20.3,11.229
12V on Bottom Layer "12V_L02_P062" (solid, pour order 62): 50,8 27,8 27,10.9 50,10.9

## Keep-outs
Keep-Out Layer:
  lines w0.254: 0,0 50,0 50,50 0,50

## Silkscreen, mask and mechanical layers (free items; w line width, h text height)
Top Overlay:
  drawing of 24 lines, arcs and shapes, not listed
  text "MSXII MOTOR CONTROLLER INTERFACE  / REV 1.6" at 14.1,47.4 h0.8